# Altium PCB 5V_3V_LDO.PcbDoc
Units mil, origin at the board's own origin, x right, y up, seen from the top; angles counter-clockwise.
Board outline 1175 x 700 mil, 2 copper layers (Top Layer, Bottom Layer); 9 components, 4 nets, 22 pads, 0 vias.
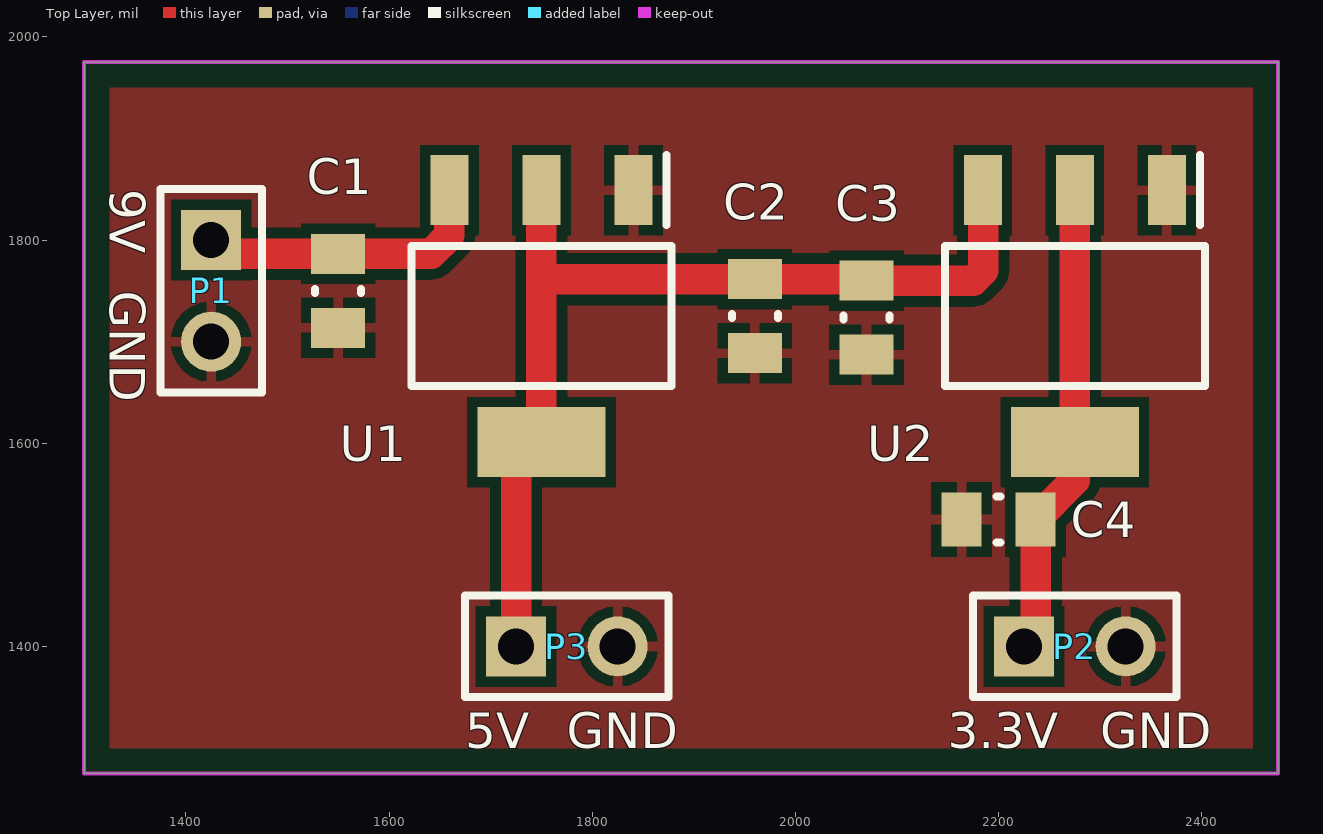
[diagram p0: Top Layer view]
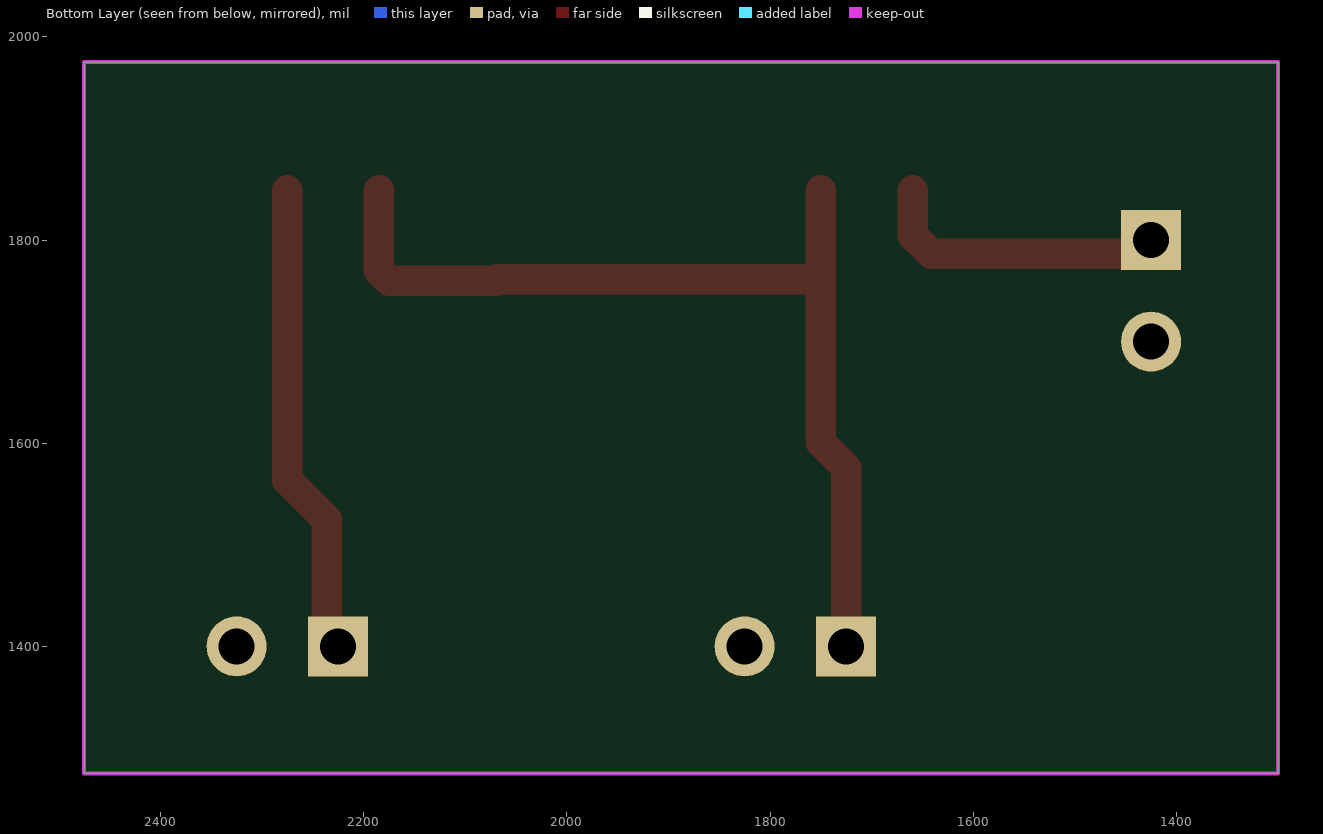
[diagram p1: Bottom Layer view, seen from below]
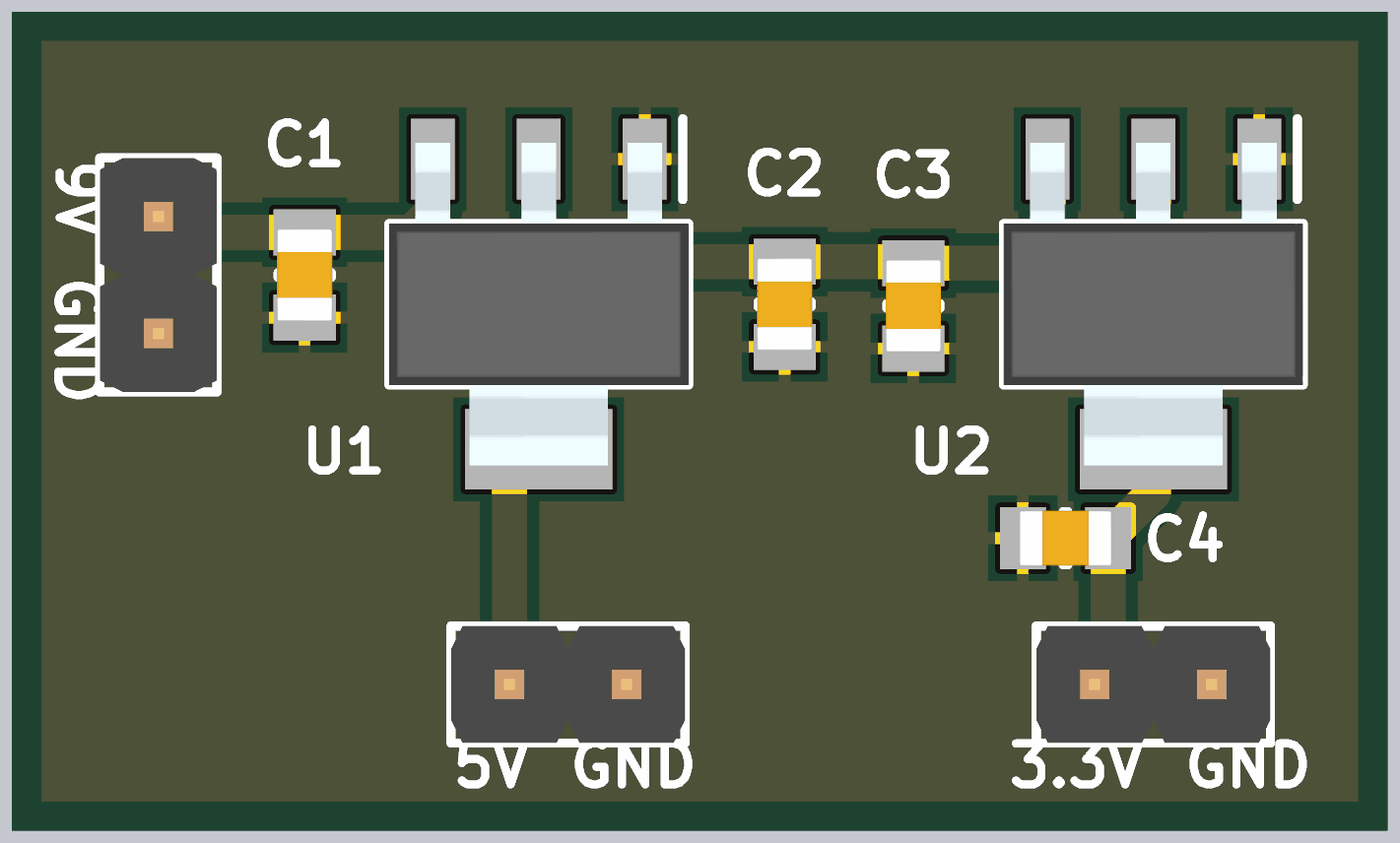
[diagram p2: 3D render of the assembled board from above, using the file's embedded part models]

## Layer stack, top to bottom
Top Solder: solder mask 0.4, Solder Resist, Dk 3.5
Top Layer: signal copper 1.4
Dielectric 1: dielectric 12.6, FR-4, Dk 4.8
Bottom Layer: signal copper 1.4
Bottom Solder: solder mask 0.4, Solder Resist, Dk 3.5

## Board outline
1300,1275 2475,1275 2475,1975 1300,1975

## Design rules (kind name [scope] priority, off if disabled: settings)
Clearance [All] p1: gap=10 ignorepadtopadclearanceinfootprint=FALSE except(0: Arc-Hole Track-Hole SMDPad-Hole THPad-Hole Via-Hole Fill-Hole Poly-Hole Region-Hole Text-Hole)
PolygonConnect [All] p1: connectstyle=Relief reliefconductorwidth=10 reliefentries=4 polygonreliefangle="90 Angle" airgapwidth=10
RoutingVias [All] p1: holewidth=28 width=50 viastyle="Through Hole" minholewidth=28 minwidth=50 maxholewidth=28 maxwidth=50
SolderMaskExpansion [All] p1: expansion=4 istentingtop=FALSE
Width [All] p1: maxlimit=50 minlimit=10 preferedwidth=10 minimp=50.000000 maximp=50.000000 favimp=50.000000
30 further rules are at their usual default settings.

## Components (designator, comment, footprint, x,y, rotation, side; value= is the part's Value field where it differs from the comment)
C1 "Capacitor - Nonpolarized" "0805 - Capacitor" 1550,1750 r90 top value=10uF
C2 "Capacitor - Nonpolarized" "0805 - Capacitor" 1960,1725 r90 top value=10uF
C3 "Capacitor - Nonpolarized" "0805 - Capacitor" 2070,1723.58 r90 top value=10uF
C4 "Capacitor - Nonpolarized" "0805 - Capacitor" 2200,1525 r0 top value=10uF
P1 "1x2 Header" HDR1X2 1425,1800 r270 top
P2 "1x2 Header" HDR1X2 2225,1400 r0 top
P3 "1x2 Header" HDR1X2 1725,1400 r0 top
U1 "TLV1117-50IDCYR" TLV1117 1750,1725 r270 top
U2 "TLV1117-33IDCYR" TLV1117 2275,1725 r270 top

## Footprints (in the part's own frame and the unit in brackets; to place one, negate y for a bottom-side part, rotate by r counter-clockwise, add the part's x,y. Pads: shape width x height; smd on the part's side, far side on the other; paste and mask are expansions set on the pad)
"0805 - Capacitor" [mm] "0805 Chip Capacitor - IPC Medium Density"
  rect 1x1.35 smd: 1(-0.925,0) 2(0.925,0)
  silkscreen extent -0.05,-0.58 0.05,0.58, body extent -1,-0.6 1,0.6, height 1.2
HDR1X2 [mm] "Connector; Header; 2 Position"
  rect 1.5x1.5 hole 0.9: 1(0,0)
  round 1.5 hole 0.9: 2(2.54,0)
  silkscreen extent -1.27,-1.27 3.81,1.27, body extent -1.27,-1.27 3.81,1.27, height 8.54
TLV1117 [mm] "SOT230P700X180-4N"
  rect 1.75x0.95 smd: 1(-3.15,2.3) 2(-3.15,0) 3(-3.15,-2.3)
  rect 1.75x3.2 smd: 2(3.15,0)
  silkscreen extent -4.03,-3.25 1.75,3.25, body extent -3.5,-3.25 3.5,3.25, height 1.8

## Part data
C1 C2 C3 C4: "Nonpolarized Capacitor", Manufacturer=Yageo, Manufacturer Part Number=CC0805KKX5R8BB106, Supplier Part Number=311-1869-1-ND
P1 P2 P3: "1x2 Pin Header"
U1: "Linear Voltage Regulator IC 5V 800MA SOT223-4", Digikey Part Number=296-21115-1-ND, Manufacturer="Texas Instruments", Mouser Part Number=595-TLV1117-50IDCYR, Datasheet Link=http://www.ti.com/lit/ds/symlink/tlv1117.pdf?HQS=TI-null-null-digikeymode-df-pf-null-wwe&ts=1590668900314, Manufacturer Part Number=TLV1117-50IDCYR
U2: "Linear Voltage Regulator IC 3.3V 800MA SOT223-4", Digikey Part Number=296-21112-1-ND, Manufacturer="Texas Instruments", Mouser Part Number=595-TLV1117-33IDCYR, Datasheet Link=http://www.ti.com/lit/ds/symlink/tlv1117.pdf?HQS=TI-null-null-digikeymode-df-pf-null-wwe&ts=1590668900314, Manufacturer Part Number=TLV1117-33IDCYR

## Nets (pads, with @x,y where several pads share a name; then routed paths per layer and width w, separated by ;. In a path a pad name is that pad's centre, name@x,y a point inside that pad or via, vN(x,y) a via of type N, cw(c..) or ccw(c..) an arc to the next point about the centre after c; other vN are vias at no path point)
+3.3: C4.2 P2.1 U2.2 | length 453.6
  Top Layer w30: P2.1@2236.42,1411.42 C4.2 2275,1563.58 2275,1600.98 U2.2@2275,1849.02
+5: C2.2 C3.2 P3.1 U1.2 U2.3 | length 979.8
  Top Layer w30: P3.1 1725,1575.98 1750,1600.98 1750,1765 ; U1.2@1750,1849.02 1750,1765 ; U2.3 2185,1848.46 2185,1770 2175,1760 C3.2 2068.58,1761.42 C2.2 1753.58,1761.42 1750,1765
+9: C1.2 P1.1 U1.3 | length 292.1
  Top Layer w30: P1.1 1438.58,1786.42 C1.2 1641.42,1786.42 1659.45,1804.45 U1.3
GND: C1.1 C2.1 C3.1 C4.1 P1.2 P2.2 P3.2 U1.1 U2.1

## Polygon pours and split planes (outlines as drawn)
GND on Top Layer "GND_L01_P000" (solid, pour order 0): 1325,1950 2450,1950 2450,1300 1325,1300

## Keep-outs
Keep-Out Layer:
  the board outline again, w3.94

## Silkscreen, mask and mechanical layers (free items; w line width, h text height)
Top Overlay:
  text "9V" at 1325,1850 h35 r270
  text "GND" at 1325,1750 h35 r270
  text "5V" at 1675,1300 h35
  text "GND" at 1775,1300 h35
  text "3.3V" at 2150,1300 h35
  text "GND" at 2300,1300 h35